# Altium PCB Driving .pcbdoc
Units mil, origin at the board's own origin, x right, y up, seen from the top; angles counter-clockwise.
Board outline 5830 x 2940 mil, 2 copper layers (Top Layer, Bottom Layer); 26 components, 25 nets, 55 pads, 21 vias.
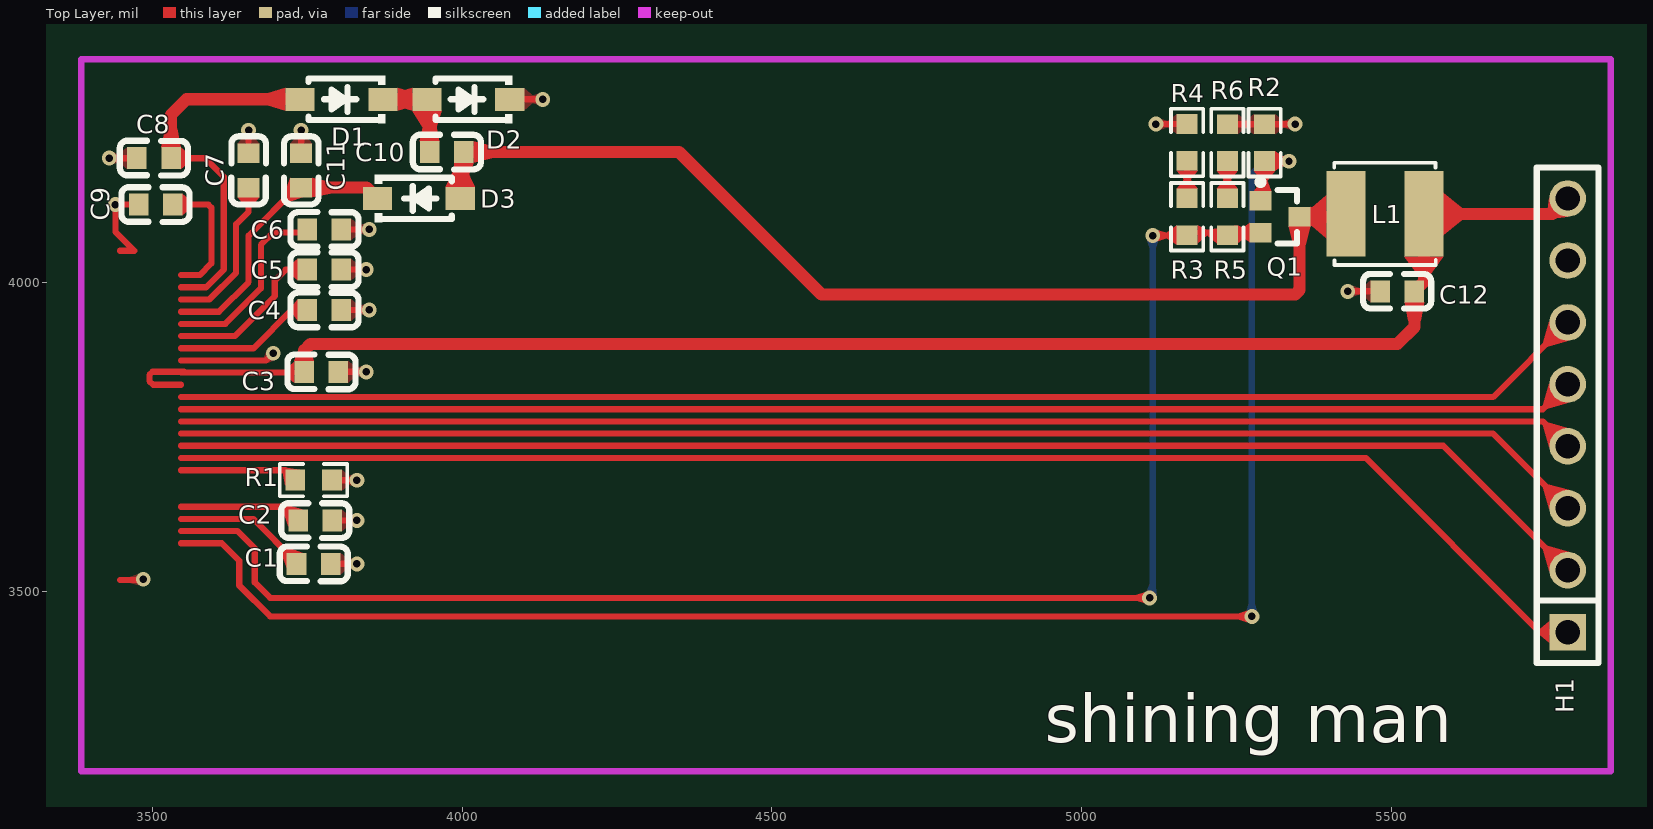
[diagram p0: Top Layer view]
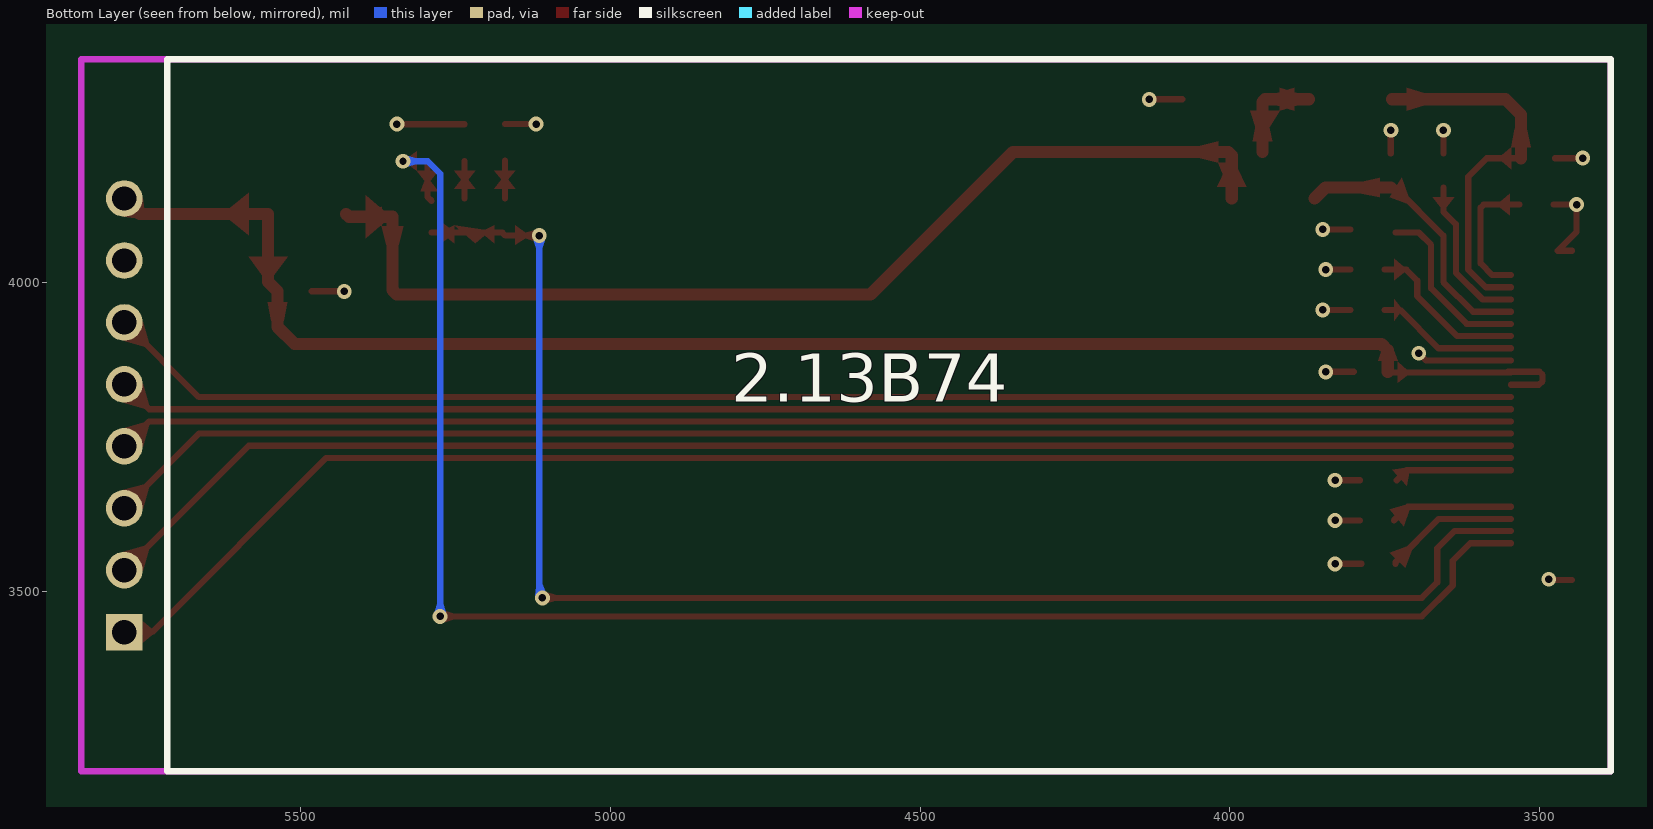
[diagram p1: Bottom Layer view, seen from below]

## Layer stack, top to bottom
Top Layer: signal copper (thickness not stored)
Dielectric: dielectric 12.6, FR-4, Dk 4.8
Bottom Layer: signal copper (thickness not stored)

## Board outline
8580,2750 2750,2750 2750,5690 8580,5690

## Components (designator, comment, footprint, x,y, rotation, side; value= is the part's Value field where it differs from the comment)
C1 "1UF" C0603 3760,3545 r180 top
C2 "1UF" C0603 3762.44,3615 r180 top
C3 "1UF" C0603 3772.44,3855 r180 top
C4 "1UF" C0603 3777.44,3955 r180 top
C5 "1UF" C0603 3777.44,4020 r180 top
C6 "1UF" C0603 3777.44,4085 r180 top
C7 "1UF" C0603 3655,4180 r270 top
C8 "1UF" C0603 3502.44,4200 r0 top
C9 "1UF" C0603 3505,4125 r0 top
C10 "4.7UF" C0603 3975,4210 r180 top
C11 "1UF" C0603 3740,4180 r270 top
C12 "4.7UF" C0603 5510,3985 r0 top
D1 "MBR0530" SOD-123_L2.7-W1.6-LS3.7-RD-1 3805,4295 r180 top
D2 "MBR0530" SOD-123_L2.7-W1.6-LS3.7-RD-1 4010,4295 r180 top
D3 "MBR0530" SOD-123_L2.7-W1.6-LS3.7-RD-1 3930,4135 r0 top
H1 "KH-2.54PH180-1X8P-L11.5" HDR-TH_8P-P2.54-V-M 5785,3784.8 r90 top
IMPORTED_IMAGE "IMPORTED_IMAGE" IMPORTED_IMAGE 7805,4100 r0 top
IMPORTED_IMAGE "IMPORTED_IMAGE" IMPORTED_IMAGE 7104.99,5440 r0 top
L1 "10uH" IND-SMD_L4.0-W4.0 5490,4110 r180 top
Q1 "SI1308EDL" SOT-323_L2.0-W1.3-P1.30-LS2.1-BR 5320.51,4105.42 r180 top
R1 "0R" R0603 3760,3680 r180 top
R2 "0R" R0603 5295.51,4225.08 r270 top
R3 "0R" R0603 5170.51,4105.42 r270 top
R4 "3R" R0603 5170.51,4225.42 r270 top
R5 "0R" R0603 5235.51,4105.42 r270 top
R6 "0.47R" R0603 5235.51,4225.08 r270 top

## Footprints (in the part's own frame and the unit in brackets; to place one, negate y for a bottom-side part, rotate by r counter-clockwise, add the part's x,y. Pads: shape width x height; smd on the part's side, far side on the other; paste and mask are expansions set on the pad)
C0603 [mm]
  rect 0.8x0.9 smd: 1(-0.7,0) 2(0.7,0)
  silkscreen extent -1.41,-0.71 1.39,0.72
HDR-TH_8P-P2.54-V-M [mm]
  rect 1.5x1.5 hole 1: 1(-8.89,0)
  round 1.5 hole 1: 2(-6.35,0) 3(-3.81,0) 4(-1.27,0) 5(1.27,0) 6(3.81,0) 7(6.35,0) 8(8.89,0)
  silkscreen extent -10.16,-1.27 10.16,1.27
IMPORTED_IMAGE [mil]
  silkscreen extent 0,-340 500,0
IND-SMD_L4.0-W4.0 [mm]
  rect 1.6x3.5 smd: 1(-1.6,0) 2(1.6,0)
  silkscreen extent -2.08,-2.1 2.08,2.1
R0603 [mil]
  rect 31.75x34.02 smd: 1(-29.66,0) 2(29.66,0)
  silkscreen extent -55,-26 55,26
SOD-123_L2.7-W1.6-LS3.7-RD-1 [mm]
  rect 1.2x0.95 smd: 1(-1.7,0) 2(1.7,0)
  silkscreen extent -1.81,-0.98 1.35,0.98
SOT-323_L2.0-W1.3-P1.30-LS2.1-BR [mil]
  rect 35.4x31.5 smd: 1(31.5,-25.6) 2(31.5,25.6) 3(-31.5,0)
  silkscreen extent -28,-61 36,43

## Via types
v1: diameter 24.02, hole 12.01, Top Layer to Bottom Layer, 21 vias

## Nets (pads, with @x,y where several pads share a name; then routed paths per layer and width w, separated by ;. In a path a pad name is that pad's centre, name@x,y a point inside that pad or via, vN(x,y) a via of type N, cw(c..) or ccw(c..) an arc to the next point about the centre after c; other vN are vias at no path point)
3.3V: C3.2 C12.2 H1.8 L1.1 | length 2596.6
  Top Layer w10: 3545.98,3834 3501,3834 3495,3840 3495,3850 3500,3855 3550.55,3855 3551.85,3853.7 ; 3545.98,3853.7 3551.85,3853.7 ; C3.2 3743.58,3853.7 3551.85,3853.7
  Top Layer w19.68: C3.2 3744.88,3889.88 3755,3900 5510,3900 5537.56,3927.56 C12.2 5552.99,4000.43 L1.1 5760.2,4110 H1.8
$1N559: C1.2 | length 218
  Top Layer w10: 3545.98,3617.5 3662.5,3617.5 3732.44,3547.56 C1.2
$1N562: C2.2 | length 198.1
  Top Layer w10: 3545.98,3637.2 3712.68,3637.2 C2.2
$1N1025: C4.2 | length 229.5
  Top Layer w10: 3545.98,3893.1 3663.1,3893.1 3725,3955 C4.2
$1N1096: C5.2 | length 263
  Top Layer w10: 3545.98,3912.7 3632.7,3912.7 3697.37,3977.37 3697.37,4002.37 3715,4020 C5.2
$1N1107: C6.2 | length 288.6
  Top Layer w10: 3545.98,3932.4 3617.4,3932.4 3675,3990 3675,4060 3695,4080 3732.44,4080
$1N1438: C7.2 | length 252.6
  Top Layer w10: 3545.98,3971.8 3591.8,3971.8 3635,4015 3635,4093.6 3655,4113.6 C7.2
$1N2074: C10.2 D1.1 D2.2 | length 158
  Top Layer w19.68: D1.1 D2.2 3947.44,4290.63 C10.2
$1N2560: C10.1 D3.2 L1.2 Q1.3 | length 1720.3
  Top Layer w19.68: D3.2 3996.93,4204.37 C10.1 4350,4210 4580,3980 5345,3980 5352.01,3987.01 Q1.3 5422.43,4105.42 L1.2
$1N3508: R3.1 R4.2 | length 60.7
  Top Layer w10: R3.1 R4.2
$1N3758: R5.1 R6.2 | length 60.3
  Top Layer w10: R5.1 R6.2
BS: R1.2 | length 191.1
  Top Layer w10: 3545.98,3696.2 3714.14,3696.2 R1.2
BUSY: H1.1 | length 2355.5
  Top Layer w10: 3545.98,3715.9 5459.1,3715.9 5740.2,3434.8 H1.1
CS: H1.4 | length 2255.6
  Top Layer w10: 3545.98,3774.9 5744.9,3774.9 H1.4
D/C: H1.3 | length 2288.9
  Top Layer w10: 3545.98,3755.3 5664.5,3755.3 H1.3
GDR: Q1.1 R2.2 | length 2691.4
  Top Layer w10: 3545.98,3578.1 3611.9,3578.1 3640,3550 3640,3510 3690,3460 v1(5275,3460) ; Q1.1 5295.51,4137.52 R2.2 5334.58,4195.42 v1(5335,4195)
  Bottom Layer w10: v1(5275,3460) 5275,4175 5295,4195 v1(5335,4195)
GND: C1.1 C2.1 C3.1 C4.1 C5.1 C6.1 C7.1 C8.1 C9.1 C11.1 C12.1 D2.1 H1.7 R1.1 R2.1 R4.1 R6.1 | length 1022.3
  Top Layer w10: v1(3430,4200) C8.1 ; 3447.58,3519 3484,3519 v1(3485,3520) ; 3447.58,4050.5 3470.5,4050.5 3440,4081.01 v1(3440,4125) C9.1 ; 3545.98,3873.4 3683.4,3873.4 v1(3695,3885) ; C7.1 v1(3655,4245) ; C11.1 v1(3740,4245) ; C1.1 v1(3830,3545) ; R1.1 v1(3830,3680) ; C2.1 v1(3830,3615) ; C3.1 v1(3845,3855) ; C4.1 v1(3850,3955) ; C5.1 v1(3845,4020) ; C6.1 v1(3850,4085) ; D2.1 v1(4130,4295) ; v1(5120,4255) 5170.43,4255 R4.1 ; R6.1 R2.1 5344.74,4254.74 v1(5345,4255) ; v1(5430,3985) C12.1
PREVGH: C11.2 D3.1 | length 451.2
  Top Layer w10: 3545.98,3952.1 3607.1,3952.1 3655,4000 3655,4075 3732.44,4152.44 C11.2
  Top Layer w19.68: C11.2 3845.63,4152.44 D3.1
PREVGL: C8.2 D1.2 | length 616.7
  Top Layer w10: C8.2 3585,4200 3615,4170 3615,4020 3586.5,3991.5 3545.98,3991.5
  Top Layer w19.68: C8.2 3530,4270 3555,4295 D1.2
RES: H1.2 | length 2322.2
  Top Layer w10: 3545.98,3735.6 5584.2,3735.6 H1.2
RESE: Q1.2 R3.2 R5.2 | length 2404
  Top Layer w10: 3545.98,3597.8 3637.2,3597.8 3665,3570 3665,3515 3690,3490 v1(5110,3490) ; v1(5115,4075) 5169.75,4075 R3.2 5174.57,4079.82 Q1.2
  Bottom Layer w10: v1(5110,3490) 5115,3495 v1(5115,4075)
SCLK: H1.5 | length 2255.7
  Top Layer w10: 3545.98,3794.6 5744.8,3794.6 H1.5
SDI: H1.6 | length 2288.9
  Top Layer w10: 3545.98,3814.3 5664.5,3814.3 H1.6
VCOM: C9.2 | length 211.3
  Top Layer w10: C9.2 3590,4125 3595,4120 3595,4030 3576.2,4011.2 3545.98,4011.2
"": 

## Polygon pours and split planes (outlines as drawn)
GND on Top Layer (solid, remove dead copper, pour order 0): 3085,3110 6180,3110 6180,4700 3085,4700
GND on Bottom Layer (solid, remove dead copper, pour order 1): 3000,3000 6435,3000 6435,4830 3000,4830

## Keep-outs
Board Outline Layer:
  lines w10 net "": 3385,3210 5854.45,3210 5854.45,4359.61 3385,4359.61 3385,3210

## Other copper
Top Layer:
  region net $1N559: 3713.75,3573.32 3706.09,3566.84 3716.69,3538.56 3742.03,3562.72
  region net $1N562: 3716.21,3640.74 3709.14,3633.67 3719.13,3606 3741.91,3632.72
  region net BS: 3717.67,3699.74 3710.6,3692.67 3714.46,3671.13 3738.08,3697.01
  region net 3.3V: 3714.13,3858.7 3714.13,3848.7 3729.13,3837.28 3729.13,3871.2
  region net 3.3V: 3735.04,3889.88 3729.13,3872.72 3760.63,3872.72 3754.72,3889.88
  region net $1N1025: 3725,3960 3725,3950 3734.13,3937.5 3734.13,3972.5
  region net $1N1096: 3719.13,4025 3719.13,4015 3734.13,4002.5 3734.13,4037.5
  region net $1N1438: 3650,4121.69 3660,4121.69 3672.5,4136.69 3637.5,4136.69
  region net PREVGL: 3560.75,4195 3560.75,4205 3545.75,4217.5 3545.75,4182.5
  region net PREVGL: 3539.84,4247.24 3520.16,4247.24 3514.25,4217.72 3545.75,4217.72
  region net VCOM: 3563.31,4120 3563.31,4130 3548.31,4142.5 3548.31,4107.5
  region net PREVGL: 3684.92,4285.16 3714.45,4276.3 3714.45,4313.7 3684.92,4304.84
  region net $1N2074: 3925.08,4285.16 3925.08,4304.84 3895.55,4313.7 3895.55,4276.3
  region net $1N2074: 3889.92,4285.16 3919.45,4276.3 3919.45,4313.7 3889.92,4304.84
  region net $1N2074: 3937.6,4246.77 3957.28,4246.77 3966.69,4276.3 3919.45,4276.3
  region net $1N2560: 3987.09,4183.23 3973.31,4153.7 4020.55,4153.7 4006.77,4183.23
  region net $1N2074: 3937.6,4257.24 3931.69,4227.72 3963.19,4227.72 3957.28,4257.24
  region net $1N2560: 3987.09,4162.76 4006.77,4162.76 4018.31,4192.28 3986.81,4192.28
  region net $1N2560: 4047.84,4219.84 4018.31,4227.72 4018.31,4192.28 4047.84,4200.16
  region net PREVGH: 3713.16,4126.09 3741.44,4136.69 3722.28,4168.19 3711.68,4138.75
  region net PREVGH: 3787.24,4142.6 3787.24,4162.28 3757.72,4168.19 3757.72,4136.69
  region net $1N2560: 5342.17,4060.15 5361.85,4060.15 5369.71,4089.67 5334.31,4089.67
  region net $1N2560: 5399.24,4115.27 5369.71,4121.17 5369.71,4089.67 5399.24,4095.58
  region net RESE: 5256.31,4074.82 5271.31,4064.07 5271.31,4095.57 5256.31,4084.82
  region net GDR: 5290.51,4161.77 5278.01,4146.77 5306.71,4146.77 5300.51,4161.77
  region net $1N2560: 5365.99,4115.27 5365.99,4095.58 5395.51,4070.97 5395.51,4139.87
  region net 3.3V: 5562.83,4011.57 5584.49,4041.1 5521.49,4041.1 5543.15,4011.57
  region net 3.3V: 5614.01,4119.84 5584.49,4144.45 5584.49,4075.55 5614.01,4100.16
  region net 3.3V: 5547.4,3937.76 5553.31,3967.28 5521.81,3967.28 5527.72,3937.76
  region net GDR: 5290.51,4164.55 5300.51,4164.55 5312.52,4179.55 5278.5,4179.55
  region net GDR: 5327.52,4200.42 5312.52,4211.3 5312.52,4179.55 5327.52,4190.42
  region net RESE: 5138.5,4070 5153.5,4059.89 5153.5,4091.64 5138.5,4080
  region net RESE: 5202.52,4074.82 5202.52,4084.82 5187.52,4091.64 5187.52,4062.32
  region net $1N3508: 5165.51,4165.96 5153.5,4150.96 5187.52,4150.96 5175.51,4165.96
  region net $1N3508: 5165.51,4164.89 5175.51,4164.89 5187.52,4179.89 5153.5,4179.89
  region net RESE: 5267.52,4074.82 5267.52,4084.82 5252.52,4091.64 5252.52,4062.32
  region net RESE: 5203.5,4074.82 5218.5,4062.32 5252.52,4091.64 5203.5,4084.82
  region net $1N3758: 5230.51,4165.96 5218.5,4150.96 5252.52,4150.96 5240.51,4165.96
  region net $1N3758: 5230.51,4164.55 5240.51,4164.55 5252.52,4179.55 5218.5,4179.55
  region net BUSY: 5740.47,3439.8 5740.47,3429.8 5755.47,3417.3 5755.47,3452.3
  region net RES: 5786.85,3564.27 5753.04,3573.83 5745.97,3566.76 5755.53,3532.95
  region net D/C: 5786.85,3664.27 5753.04,3673.83 5745.97,3666.76 5755.53,3632.95
  region net CS: 5786.85,3764.27 5753.04,3773.83 5745.97,3766.76 5755.53,3732.95
  region net SCLK: 5755.53,3836.65 5745.97,3802.84 5753.04,3795.77 5786.85,3805.33
  region net SDI: 5755.53,3936.65 5745.97,3902.84 5753.04,3895.77 5786.85,3905.33
  region net 3.3V: 5755.53,4136.65 5753.24,4116.96 5767.16,4103.04 5786.85,4105.33
  region net RESE: 5102.06,3499.01 5089.59,3495 5089.59,3485 5102.06,3480.99
  region net GDR: 5267.06,3469.01 5254.59,3465 5254.59,3455 5267.06,3450.99
  region net GDR: 5327.38,4204.28 5314.77,4200.42 5314.41,4190.42 5326.75,4186.28
  region net RESE: 5122.94,4065.99 5135.41,4070 5135.41,4080 5122.94,4084.01
Bottom Layer:
  region net RESE: 5121.5,3493.47 5120,3507.87 5110,3512.45 5105.12,3500.97
  region net GDR: 5284.01,3467.94 5280,3480.41 5270,3480.41 5265.99,3467.94
  region net GDR: 5327.06,4204.01 5314.59,4200 5314.59,4190 5327.06,4185.99
  region net RESE: 5105.99,4067.06 5110,4054.59 5120,4054.59 5124.01,4067.06

## Silkscreen, mask and mechanical layers (free items; w line width, h text height)
Top Silkscreen Layer:
  text "GOOD DISPLAY" at 7572.57,3561.64 h77.88
  text "shining man" at 4940.99,3256.64 h77.88
Bottom Silkscreen Layer:
  lines w10 net "": 3385,3210 5715.71,3210 5715.71,4359.61 3385,4359.61 3385,3210
  text "2.13B74" at 4804.67,3806.64 h77.88